# Altium PCB V6_2.pcbdoc
Units mm, origin at the board's own origin, x right, y up, seen from the top; angles counter-clockwise.
Board outline 70 x 20 mm, 4 copper layers (Top Layer, Signal Layer 1, Signal Layer 2, Bottom Layer), stack 0.778 mm thick; 8 components, 10 nets, 76 pads, 39 vias.
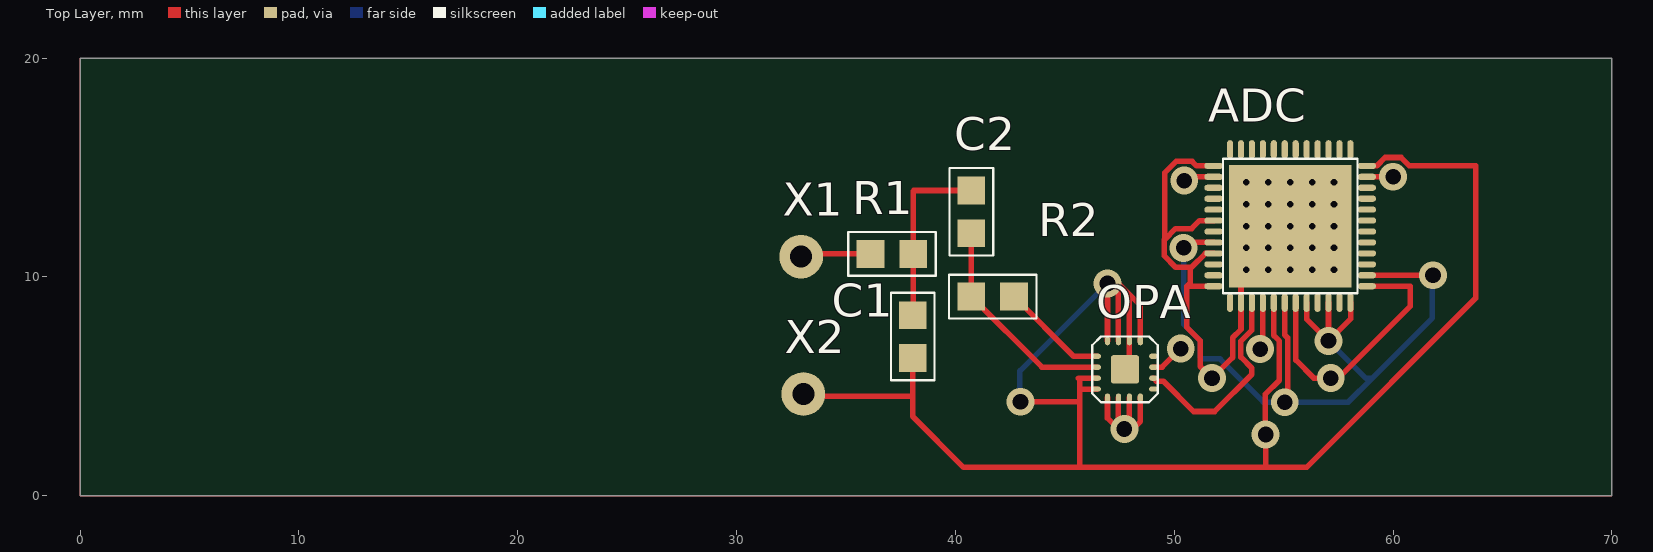
[diagram p0: Top Layer view]
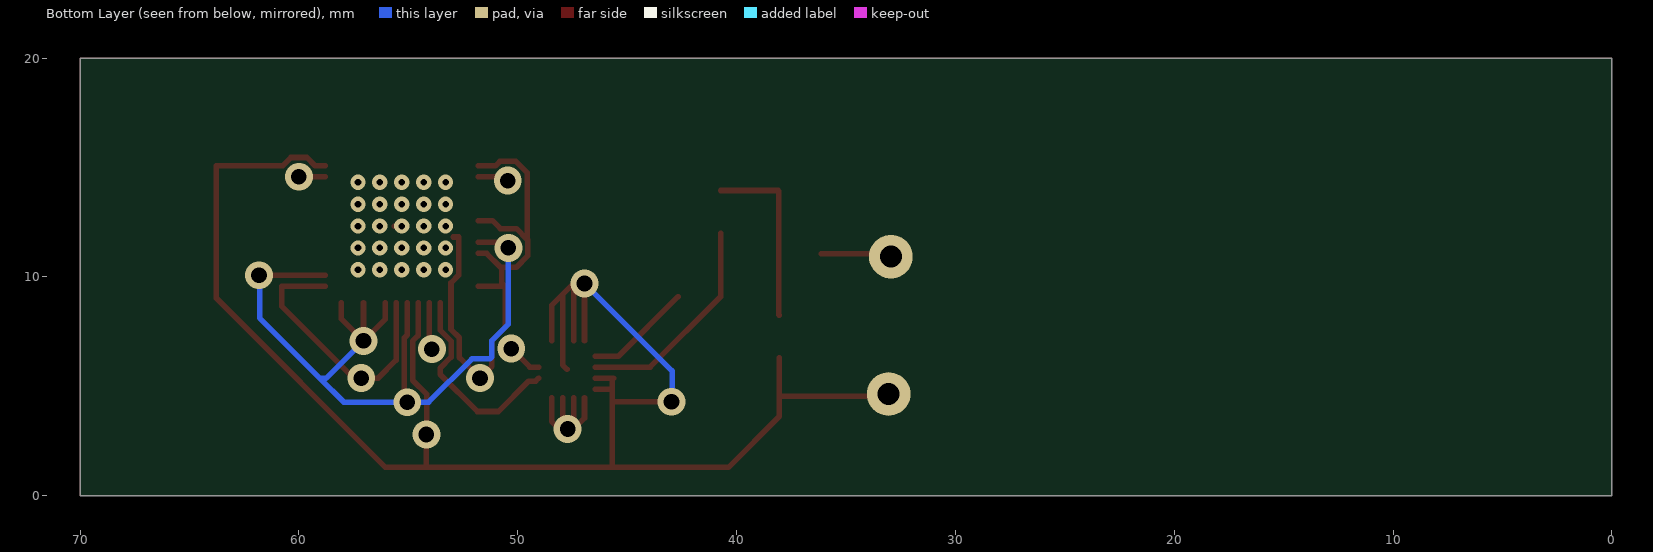
[diagram p1: Bottom Layer view, seen from below]
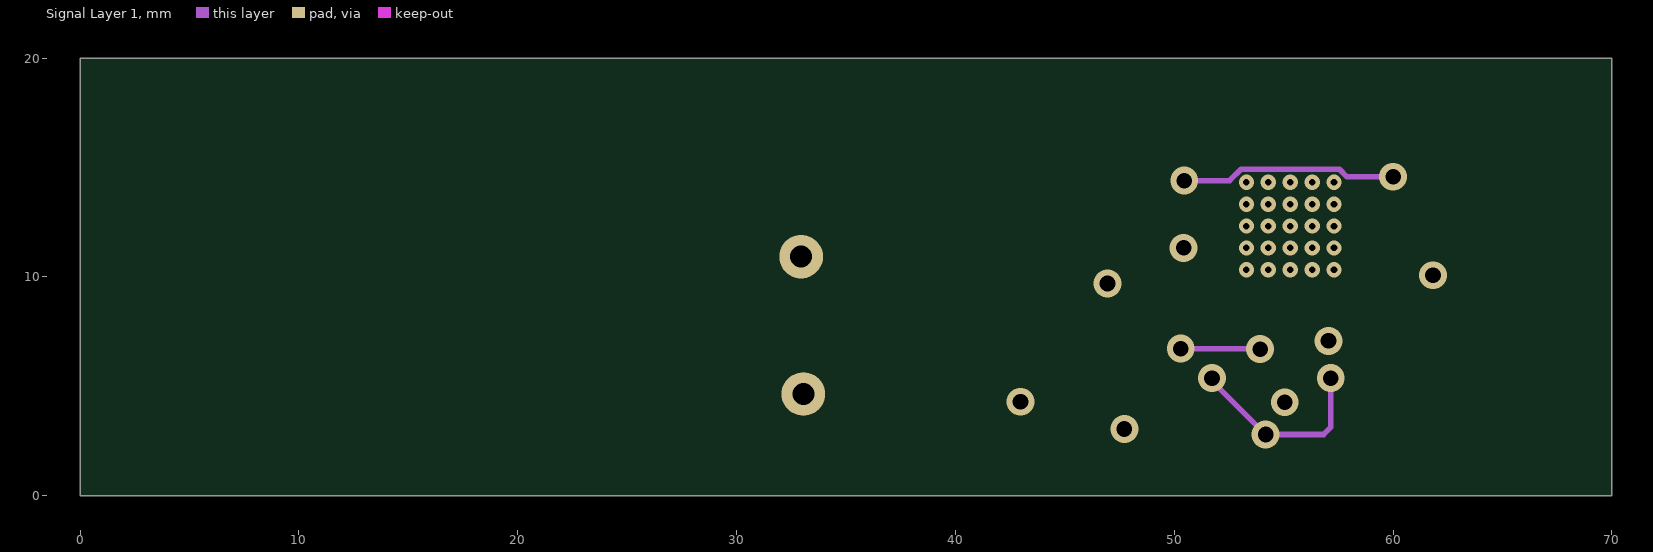
[diagram p2: Signal Layer 1]

## Layer stack, top to bottom
Top Solder: solder mask 0.0102, Solder Resist, Dk 3.5
Top Layer: signal copper 0.0356
Dielectric 1: core 0.254, FR-4, Dk 4.2
Signal Layer 1: signal copper 0.036
Dielectric 3: prepreg 0.127, Dk 4.2
Signal Layer 2: signal copper 0.036
Dielectric 2: core 0.254, Dk 4.2
Bottom Layer: signal copper 0.0356
Bottom Solder: solder mask 0.0102, Solder Resist, Dk 3.5

## Board outline
0,0 70,0 70,20 0,20

## Design rules (kind name [scope] priority, off if disabled: settings)
Clearance [All] p1: gap=0.12
PolygonConnect [All] p1: connectstyle=Relief reliefconductorwidth=0.254 reliefentries=4 polygonreliefangle="90 Angle" airgapwidth=0.254
RoomDefinition V6_2 [InComponentClass('V6_2')] p1: confinementstyle=ConfineOut formatcopy=TRUE lockcomponents=FALSE outline -26,-26 24.8,-26 24.8,-0.6 -26,-0.6
RoutingVias [All] p1: holewidth=0.711 width=1.27 viastyle="Through Hole" minholewidth=0.711 minwidth=1.27 maxholewidth=0.711 maxwidth=1.27
ShortCircuit [All] p1: allowed=TRUE
SolderMaskExpansion [All] p1: expansion=0.102
Width [All] p1: maxlimit=0.254 minlimit=0.254 preferedwidth=0.254
29 further rules are at their usual default settings.

## Components (designator, comment, footprint, x,y, rotation, side; value= is the part's Value field where it differs from the comment)
ADC "ADS" ADS 55.3,12.325 r0 top
C1 "4.7pF" con 36.925,1.425 r90 top
C2 "2.2pF" con 41.85,18.825 r270 top
OPA "OPA" OPA 44.95,0.375 r0 top
R1 "3.3k" Rezistor 23.85,-13.95 r0 top
R2 "2.2k" Rezistor 28.45,-15.9 r0 top
X1 "" DRL10 32.95,10.925 r0 top
X2 "GND" DRL10 33.05,4.65 r0 top

## Footprints (in the part's own frame and the unit in brackets; to place one, negate y for a bottom-side part, rotate by r counter-clockwise, add the part's x,y. Pads: shape width x height; smd on the part's side, far side on the other; paste and mask are expansions set on the pad)
ADS [mm]
  oval 0.85x0.28 smd mask+0.07: 1(-3.5,2.75) 2(-3.5,2.25) 3(-3.5,1.75) 4(-3.5,1.25) 5(-3.5,0.75) 6(-3.5,0.25) 7(-3.5,-0.25) 8(-3.5,-0.75) 9(-3.5,-1.25) 10(-3.5,-1.75) 11(-3.5,-2.25) 12(-3.5,-2.75) 25(3.5,-2.75) 26(3.5,-2.25) 27(3.5,-1.75) 28(3.5,-1.25) 29(3.5,-0.75) 30(3.5,-0.25) 31(3.5,0.25) 32(3.5,0.75) 33(3.5,1.25) 34(3.5,1.75) 35(3.5,2.25) 36(3.5,2.75)
  oval 0.28x0.85 smd mask+0.07: 13(-2.75,-3.5) 14(-2.25,-3.5) 15(-1.75,-3.5) 16(-1.25,-3.5) 17(-0.75,-3.5) 18(-0.25,-3.5) 19(0.25,-3.5) 20(0.75,-3.5) 21(1.25,-3.5) 22(1.75,-3.5) 23(2.25,-3.5) 24(2.75,-3.5) 37(2.75,3.5) 38(2.25,3.5) 39(1.75,3.5) 40(1.25,3.5) 41(0.75,3.5) 42(0.25,3.5) 43(-0.25,3.5) 44(-0.75,3.5) 45(-1.25,3.5) 46(-1.75,3.5) 47(-2.25,3.5) 48(-2.75,3.5)
  rect 5.6x5.6 smd mask+0.1: ""(0,0)
  silkscreen extent -3.08,-3.08 3.08,3.08
con [mm]
  rect 1.27x1.27 smd mask+0.1: 1(4.875,-1.125) 2(6.825,-1.125)
  silkscreen extent 3.85,-2.12 7.85,-0.13
DRL10 [mm]
  round 2 hole 1: DRIL(0,0)
OPA [mm]
  oval 0.4x0.24 smd mask+0.07: 1(1.5,6) 2(1.5,5.5) 3(1.5,5) 4(1.5,4.5) 9(4.1,4.5) 10(4.1,5) 11(4.1,5.5) 12(4.1,6)
  oval 0.24x0.4 smd mask+0.07: 5(2,4.1) 6(2.5,4.1) 7(3,4.1) 8(3.5,4.1) 13(3.5,6.7) 14(3,6.7) 15(2.5,6.7) 16(2,6.7)
  rrect20% 1.3x1.3 smd mask+0.1: ""(2.8,5.4)
  silkscreen extent 1.3,3.9 4.3,6.9
Rezistor [mm]
  rect 1.27x1.27 smd mask+0.1: 1(12.275,25) 2(14.225,25)
  silkscreen extent 11.25,24 15.25,26

## Part data
C1 C2: library part Condenser1
OPA: library part ADA
R1 R2: library part Resistor1
X1 X2: library part DRL

## Via types
v1: diameter 0.7, hole 0.3, Top Layer to Bottom Layer, 25 vias
v2: diameter 1.27, hole 0.711, Top Layer to Bottom Layer, 14 vias

## Nets (pads, with @x,y where several pads share a name; then routed paths per layer and width w, separated by ;. In a path a pad name is that pad's centre, name@x,y a point inside that pad or via, vN(x,y) a via of type N, cw(c..) or ccw(c..) an arc to the next point about the centre after c; other vN are vias at no path point)
+1.8V: ADC.2 ADC.35 | length 12.5
  Top Layer w0.254: v2(50.452,14.401) 50.627,14.575 ADC.2 ; ADC.35 v2(60,14.575)
  Signal Layer 1 w0.254: v2(50.452,14.401) 52.531,14.401 53.053,14.922 57.547,14.922 57.894,14.575 v2(60,14.575)
+3.3V: ADC.8 ADC.18 ADC.20 ADC.22 ADC.24 ADC.26 | length 38.1
  Top Layer w0.254: v2(50.427,11.326) 50.677,11.575 ADC.8 ; v2(55.05,4.275) 55.181,4.406 55.181,7.22 55.05,7.351 ADC.18 ; ADC.20 56.05,8.075 v2(57.05,7.075) ; ADC.22 v2(57.05,7.075) ; ADC.24@58.071,8.825 58.071,8.096 v2(57.05,7.075) ; ADC.26 v2(61.825,10.075)
  Bottom Layer w0.254: v2(50.427,11.326) 50.427,7.845 51.182,7.09 51.182,6.343 51.268,6.257 52.09,6.257 54.072,4.275 v2(55.05,4.275) 57.95,4.275 59.037,5.362 ; v2(57.05,7.075) 58.763,5.362 59.037,5.362 ; v2@61.8,9.925 61.8,8.125 59.037,5.362
+5V: OPA.5 OPA.6 OPA.7 OPA.8 | length 6.7
  Top Layer w0.254: OPA.5 46.95,3.55 v2@47.45,3.05 ; OPA.6 v2@47.45,3.05 ; OPA.7 47.95,3.075 v2@47.925,3.05 ; OPA.8 48.45,3.4 48.1,3.05 v2@47.925,3.05 ; v2@47.45,3.05 v2(47.725,3.05) v2@47.925,3.05
GND: ADC. ADC.1 ADC.6 ADC.9 ADC.12 ADC.14 ADC.17 ADC.19 ADC.25 ADC.36 C1.1 OPA. OPA.3 OPA.4 OPA.13 OPA.14 OPA.15 OPA.16 X2.DRIL | length 131.5
  Top Layer w0.254: X2.DRIL 33.75,4.65 33.85,4.55 38.05,4.55 ; C1.1 38.05,4.55 ; v2(42.975,4.3) 45.65,4.3 45.675,4.275 ; OPA.4 45.775,4.875 45.675,4.775 ; OPA.3 45.625,5.375 45.675,5.325 45.675,4.775 ; OPA.16 v2(46.95,9.7) ; OPA.15 47.45,9.7 47.95,9.2 ; OPA. 47.95,5.975 OPA.14 47.95,9.2 ; OPA.13 48.45,8.7 47.95,9.2 ; ADC.12 50.575,9.575 ; ADC.9 51.424,11.075 50.793,10.444 ; ADC.6 51.16,12.575 50.793,12.208 50.062,12.208 49.57,11.716 ; ADC.1 51.026,15.075 50.818,15.283 50.087,15.283 49.57,14.766 49.57,11.716 ; ADC.@52.956,11.825 52.703,11.825 52.703,10.078 53.05,9.731 ADC.14 53.05,7.601 52.669,7.22 52.669,6.319 v2(51.725,5.375) 51.182,5.918 51.182,7.09 50.575,7.697 50.575,9.575 ; ADC.17 54.55,7.322 54.807,7.065 54.807,5.279 54.168,4.64 54.168,3.332 54.175,3.325 v2(54.175,2.8) 54.175,1.3 ; ADC.19 55.555,8.82 55.555,6.195 56.375,5.375 v2(57.15,5.375) 57.5,5.375 60.775,8.65 60.775,9.575 ADC.25 ; ADC.36 59.253,15.075 59.635,15.457 60.365,15.457 60.747,15.075 63.775,15.075 63.775,9.025 56.05,1.3 54.175,1.3 ; 38.05,4.55 38.05,3.625 40.375,1.3 45.675,1.3 ; 45.675,1.3 54.175,1.3 ; 45.675,1.3 45.675,4.275 ; 45.675,4.275 45.675,4.775 ; 49.57,11.716 49.545,11.691 49.545,10.96 50.062,10.444 50.793,10.444 ; 50.575,9.575 50.725,9.725 50.725,10.376 50.793,10.444
  Signal Layer 1 w0.254: v2(51.725,5.375) 51.725,5.25 v2(54.175,2.8) 56.825,2.8 57.15,3.125 v2(57.15,5.375)
  Bottom Layer w0.254: v2(42.975,4.3) 42.95,4.325 42.95,5.7 v2(46.95,9.7)
NetADC_15: ADC.15 OPA.10 | length 9.5
  Top Layer w0.254: OPA.10 49.183,5.242 49.497,5.242 50.889,3.85 51.847,3.85 53.55,5.553 53.55,5.828 53.043,6.335 53.043,7.065 53.55,7.572 ADC.15
NetADC_16: ADC.16 OPA.11 | length 7.4
  Top Layer w0.254: OPA.11 49.45,5.875 v2(50.3,6.725) ; v2(53.925,6.7) 54.05,6.825 ADC.16
  Signal Layer 1 w0.254: v2(50.3,6.725) 53.9,6.725 v2(53.925,6.7)
NetC1_2: C1.2 C2.1 R1.2 | length 8.3
  Top Layer w0.254: C1.2 38.075,8.275 R1.2 38.075,13.925 38.1,13.95 C2.1
NetC2_2: C2.2 OPA.2 R2.1 | length 10
  Top Layer w0.254: C2.2 R2.1 43.95,5.875 OPA.2
NetOPA_1: OPA.1 R2.2 | length 4.9
  Top Layer w0.254: R2.2 45.4,6.375 OPA.1
NetR1_1: R1.1 X1.DRIL | length 3.2
  Top Layer w0.254: X1.DRIL 33.075,11.05 R1.1
pads on no net: ADC.3 ADC.4 ADC.5 ADC.7 ADC.10 ADC.11 ADC.13 ADC.21 ADC.23 ADC.27 ADC.28 ADC.29 ADC.30 ADC.31 ADC.32 ADC.33 ADC.34 ADC.37 ADC.38 ADC.39 ADC.40 ADC.41 ADC.42 ADC.43 ADC.44 ADC.45 ADC.46 ADC.47 ADC.48 OPA.9 OPA.12
copper on no net: | length 180.3
  Top Layer w0.01: 0,0 0,20 70,20 70,0 0,0
  Top Layer w0.254: v1(55.3,12.325) v1@55.65,12.325
  other v1: 53.3,10.325 54.3,10.325 55.3,10.325 56.3,10.325 57.3,10.325 53.3,11.325 54.3,11.325 55.3,11.325 56.3,11.325 57.3,11.325 53.3,12.325 54.3,12.325 56.3,12.325 57.3,12.325 53.3,13.325 54.3,13.325 55.3,13.325 56.3,13.325 57.3,13.325 53.3,14.325 54.3,14.325 55.3,14.325 56.3,14.325 57.3,14.325